# Altium PCB Copy of Plant_Monitor.PcbDoc
Units mil, origin at the board's own origin, x right, y up, seen from the top; angles counter-clockwise.
Board outline 6000 x 4000 mil, 2 copper layers (Top Layer, Bottom Layer); 19 components, 10 nets, 80 pads, 0 vias.
Unrouted connection lines stored in the file: 30.
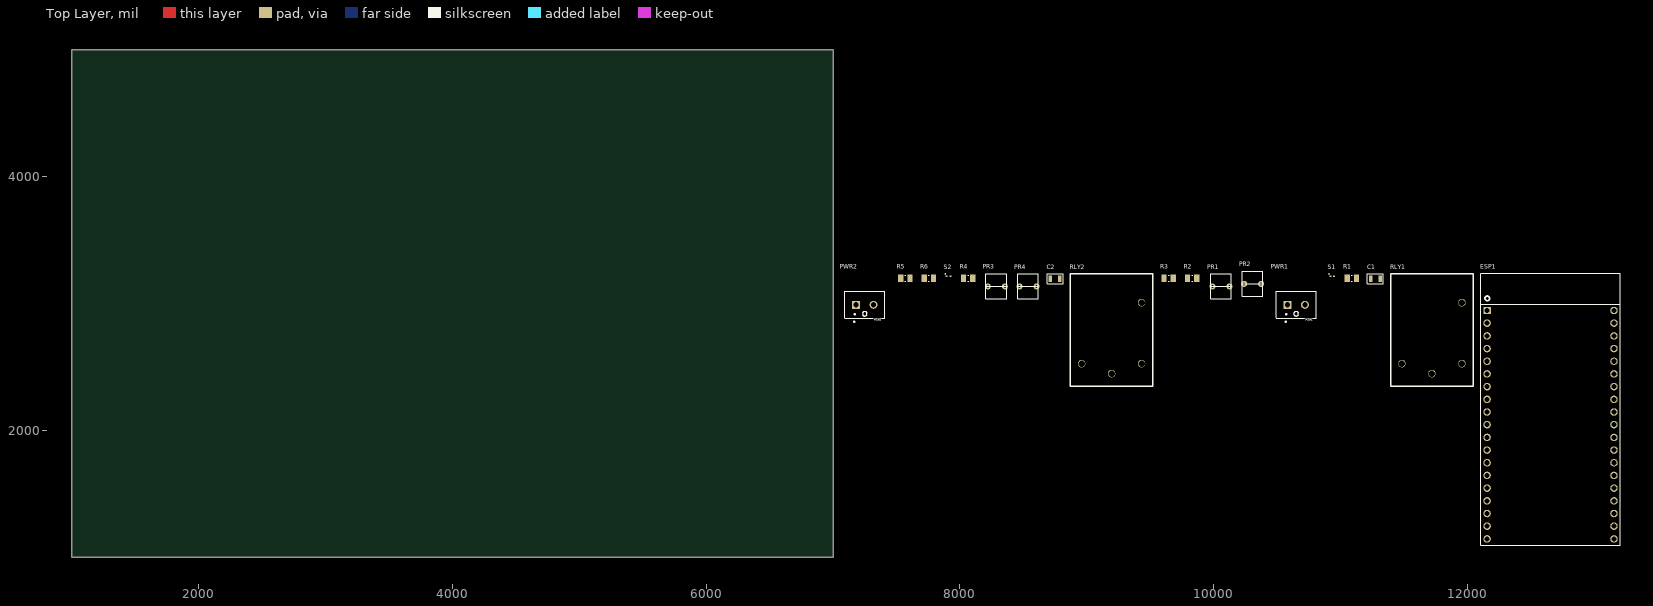
[diagram p0: Top Layer view]
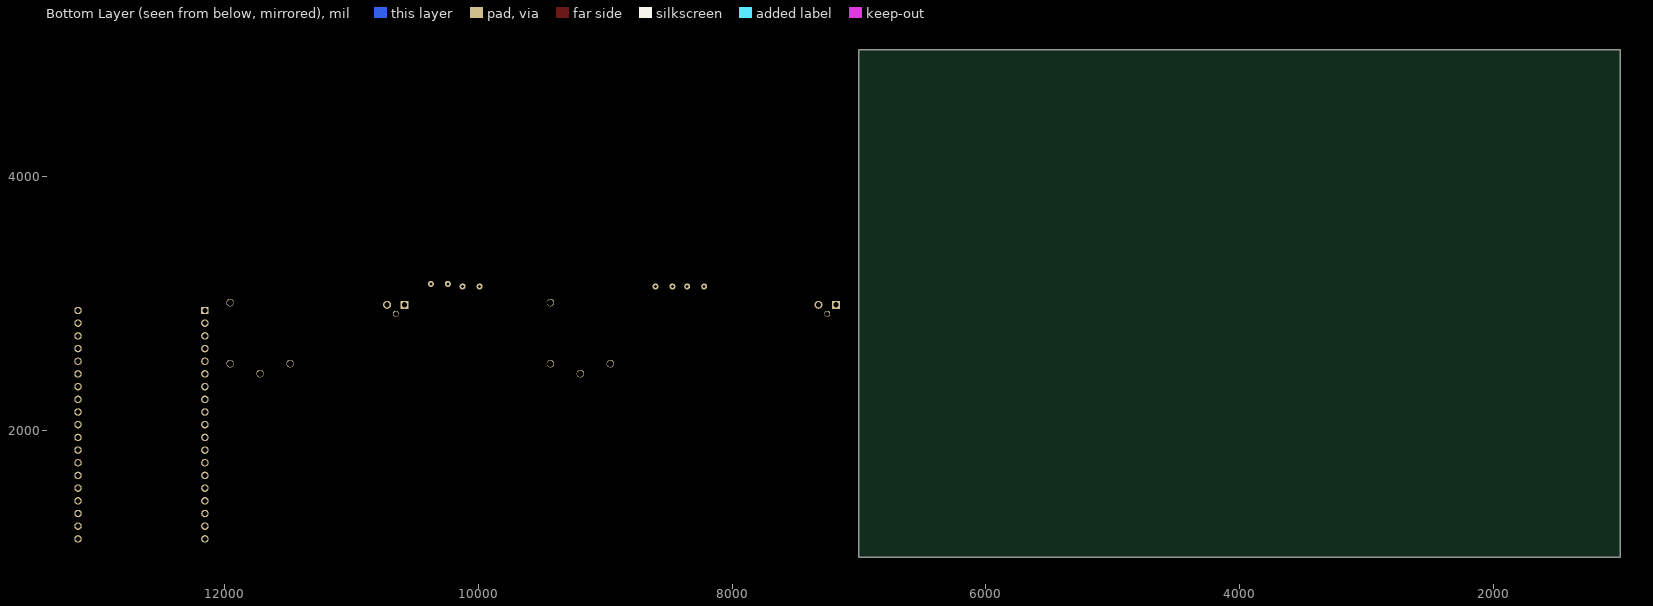
[diagram p1: Bottom Layer view, seen from below]

## Layer stack, top to bottom
Top Solder: solder mask 0.4, Solder Resist, Dk 3.5
Top Layer: signal copper 1.4
Dielectric 1: dielectric 12.6, FR-4, Dk 4.8
Bottom Layer: signal copper 1.4
Bottom Solder: solder mask 0.4, Solder Resist, Dk 3.5

## Board outline
1000,1000 7000,1000 7000,5000 1000,5000

## Design rules (kind name [scope] priority, off if disabled: settings)
Clearance [All] p1: gap=10 ignorepadtopadclearanceinfootprint=FALSE except(0: Arc-Hole Track-Hole SMDPad-Hole THPad-Hole Via-Hole Fill-Hole Poly-Hole Region-Hole Text-Hole)
PolygonConnect [All] p1: connectstyle=Relief reliefconductorwidth=10 reliefentries=4 polygonreliefangle="90 Angle" airgapwidth=10
RoutingVias [All] p1: holewidth=28 width=50 viastyle="Through Hole" minholewidth=28 minwidth=50 maxholewidth=28 maxwidth=50
SolderMaskExpansion [All] p1: expansion=4 istentingtop=FALSE
Width [All] p1: maxlimit=10 minlimit=10 preferedwidth=10
30 further rules are at their usual default settings.

## Components (designator, comment, footprint, x,y, rotation, side; value= is the part's Value field where it differs from the comment)
C1 "08055C104KAT2A" R0805 11275,3195 r0 top
C2 "08055C104KAT2A" R0805 8750,3195 r0 top
ESP1 "ESP32 -- DEVKIT" "ESP32 -- DEVKITC" 12655,2045 r0 top
PR1 "Photo resistor" Photoresistor 9990,3135 r0 top
PR2 "Photo resistor" Photoresistor 10240,3155 r0 top
PR3 "Photo resistor" Photoresistor 8220,3135 r0 top
PR4 "Photo resistor" Photoresistor 8470,3135 r0 top
PWR1 "172286-1102" 2x1 10650,2990 r0 top
PWR2 "172286-1102" 2x1 7250,2990 r0 top
R1 "CRCW08051K00FKEA" RESC2013X50X30NL20T20 11090,3200 r0 top
R2 "CRCW08051K00FKEA" RESC2013X50X30NL20T20 9830,3200 r0 top
R3 "CRCW08051K00FKEA" RESC2013X50X30NL20T20 9645,3200 r0 top
R4 "CRCW08051K00FKEA" RESC2013X50X30NL20T20 8065,3200 r0 top
R5 "CRCW08051K00FKEA" RESC2013X50X30NL20T20 7570,3200 r0 top
R6 "CRCW08051K00FKEA" RESC2013X50X30NL20T20 7755,3200 r0 top
RLY1 "G5LE-1A4 DC24" "24V RELAY" 11720,2790 r90 top
RLY2 "G5LE-1A4 DC24" "24V RELAY" 9195,2790 r90 top
S1 "Schottky" SODFL100X40-2N 10935,3215 r0 top
S2 "Schottky" SODFL100X40-2N 7910,3215 r0 top

## Footprints (in the part's own frame and the unit in brackets; to place one, negate y for a bottom-side part, rotate by r counter-clockwise, add the part's x,y. Pads: shape width x height; smd on the part's side, far side on the other; paste and mask are expansions set on the pad)
2x1 [mm]
  rect 1.6x1.6 hole 1.02: 1(-1.75,0)
  round 1.6 hole 1.02: 2(1.75,0)
  round 1.2 hole 1: A14(0,-1.8)
  silkscreen extent -4,-3.5 4,2.7, body extent -4.5,-2.88 4.5,5.79, height 8.9
"24V RELAY" [mm]
  round 1.5 hole 1.3: 1(-8.7,0) 2(-6.7,6) 3(5.5,-6) 5(-6.7,-6)
  silkscreen extent -11.25,-8.25 11.25,8.25, body extent -11.25,-8.3 11.25,8.2, height 19
"ESP32 -- DEVKITC" [mm]
  rect 1.5x1.5 hole 1.02: 1(-12.7,22.86)
  round 1.5 hole 1.02: 2(-12.7,20.32) 3(-12.7,17.78) 4(-12.7,15.24) 5(-12.7,12.7) 6(-12.7,10.16) 7(-12.7,7.62) 8(-12.7,5.08) 9(-12.7,2.54) 10(-12.7,0) 11(-12.7,-2.54) 12(-12.7,-5.08) 13(-12.7,-7.62) 14(-12.7,-10.16) 15(-12.7,-12.7) 16(-12.7,-15.24) 17(-12.7,-17.78) 18(-12.7,-20.32) 19(-12.7,-22.86) 20(12.7,-22.86) 21(12.7,-20.32) 22(12.7,-17.78) 23(12.7,-15.24) 24(12.7,-12.7) 25(12.7,-10.16) 26(12.7,-7.62) 27(12.7,-5.08) 28(12.7,-2.54) 29(12.7,0) 30(12.7,2.54) 31(12.7,5.08) 32(12.7,7.62) 33(12.7,10.16) 34(12.7,12.7) 35(12.7,15.24) 36(12.7,17.78) 37(12.7,20.32) 38(12.7,22.86)
  silkscreen extent -13.98,-24.1 13.95,30.3, body extent -14.12,-24.88 13.82,30.22, height 4.16
Photoresistor [mm]
  round 1.2 hole 0.6: 1(0,0) 2(3.4,0)
  silkscreen extent -0.37,-2.5 3.77,2.5, body extent -1.02,-2.41 4.06,2.66, height 1.27
R0805 [mm]
  rect 0.7x1.3 smd: 1(-0.95,0) 2(0.95,0)
  silkscreen extent -1.6,-0.97 1.6,0.97
RESC2013X50X30NL20T20 [mm] "Chip Resistor, 2-Leads, Body 2.00x1.25mm, IPC Medium Density"
  rect 1.05x1.45 smd: 1(-0.925,0) 2(0.925,0)
  silkscreen extent -0.1,-0.63 0.1,0.63, body extent -1.1,-0.72 1.1,0.72, height 0.5
SODFL100X40-2N [mm] "SODFL, 2-Leads, Body 0.60x1.00mm, IPC Medium Density"
  rect 0.4x0.35 smd: 1(-0.381,0) 2(0.381,0)
  silkscreen extent -0.7,0.43 -0.6,0.52, body extent -0.5,-0.33 0.5,0.33, height 0.4

## Part data
C1 C2: library part CAP-NP-2, "Chip Capacitor, Ceramic, 0.1 uF, 10%, 50 V, 0805, RoHS, Tape and Reel", Capacitance=100nF, Case Size/Dimension=0805, Dielectric=X7R, Manufacturer=AVX, Rated Voltage=50V, Tolerance (%)=±10%, Datasheet URL=http://www.farnell.com/datasheets/319609.pdf, Datasheet Version=Sep-07, Manufacturer URL=http://www.avx.com/
PWR1 PWR2: library part "2 Pin Connector", "MOLEX - 172286-1102. - CONNECTOR, HEADER, 2POS, 1ROW, 3.5MM", Color=Black, Current Rating=14A, Voltage Rating=400V, Connector Type="Male Pin", Contact Material="Copper Alloy", Contact Plating=Tin, Fastening Type=Latch, Gender=Male, Mount="Through Hole", Number of Circuits=2, Number of Contacts=2, Number of Pins=2, Number of Positions=2, Number of Rows=1, Orientation=Vertical, Packaging=Tray, Pitch=0.138inch, REACH SVHC=Unknown, Termination=Solder
R1 R2 R3 R4 R5 R6: library part CMP-1013-00510-2, Manufacturer="Vishay Dale", Part Number=CRCW08051K00FKEA
RLY1 RLY2: library part RELAY, Supplier Part Number 1=Z2254-ND, Supplier 1=Digi-Key

## Nets (pads, with @x,y where several pads share a name; then routed paths per layer and width w, separated by ;. In a path a pad name is that pad's centre, name@x,y a point inside that pad or via, vN(x,y) a via of type N, cw(c..) or ccw(c..) an arc to the next point about the centre after c; other vN are vias at no path point)
3.3V: ESP1.1 PR1.1 PR2.2 PR3.2 PR4.2
Battery: C1.1 C2.1 ESP1.10 ESP1.15 ESP1.38 PWR1.1 PWR2.1 R2.1 R3.1 R5.1 R6.1 S1.1 S2.1
NetR1_1: R1.1 S1.2
NetR4_1: R4.1 S2.2
Rechargable_Battery_Input: C1.2 PWR1.2 R1.2
Solar_Panel_Input: C2.2 PWR2.2 R4.2
V_Divider_1: ESP1.31 PR1.2 R3.2
V_Divider_2: ESP1.30 PR2.1 R2.2
V_Divider_3: ESP1.27 PR3.1 R5.2
V_Divider_4: ESP1.26 PR4.1 R6.2
pads on no net: ESP1.2 ESP1.3 ESP1.4 ESP1.5 ESP1.6 ESP1.7 ESP1.8 ESP1.9 ESP1.11 ESP1.12 ESP1.13 ESP1.14 ESP1.16 ESP1.17 ESP1.18 ESP1.19 ESP1.20 ESP1.21 ESP1.22 ESP1.23 ESP1.24 ESP1.25 ESP1.28 ESP1.29 ESP1.32 ESP1.33 ESP1.34 ESP1.35 ESP1.36 ESP1.37 PWR1.A14 PWR2.A14 RLY1.1 RLY1.2 RLY1.3 RLY1.5 RLY2.1 RLY2.2 RLY2.3 RLY2.5